# EAGLE board IEEE-ROV-Training (EAGLE 9.6.2)
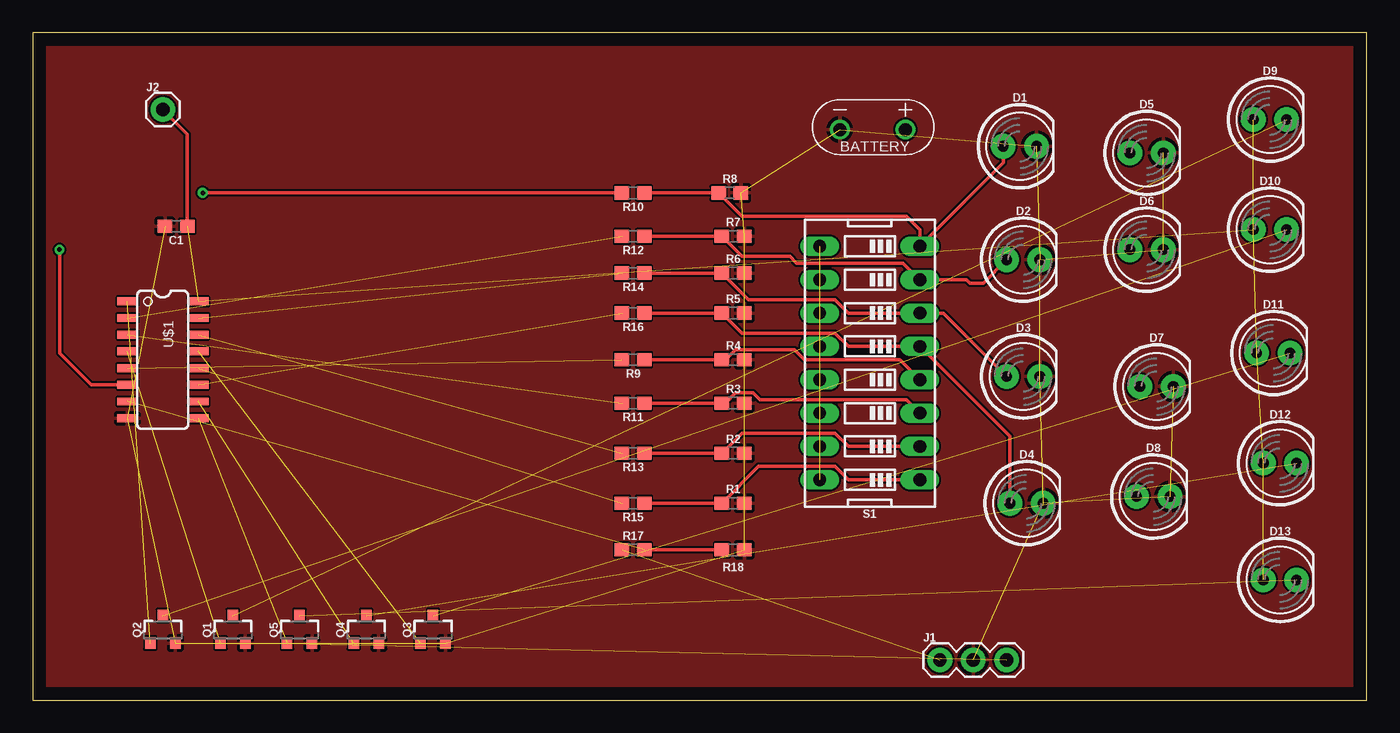
[diagram p0: board, top side]
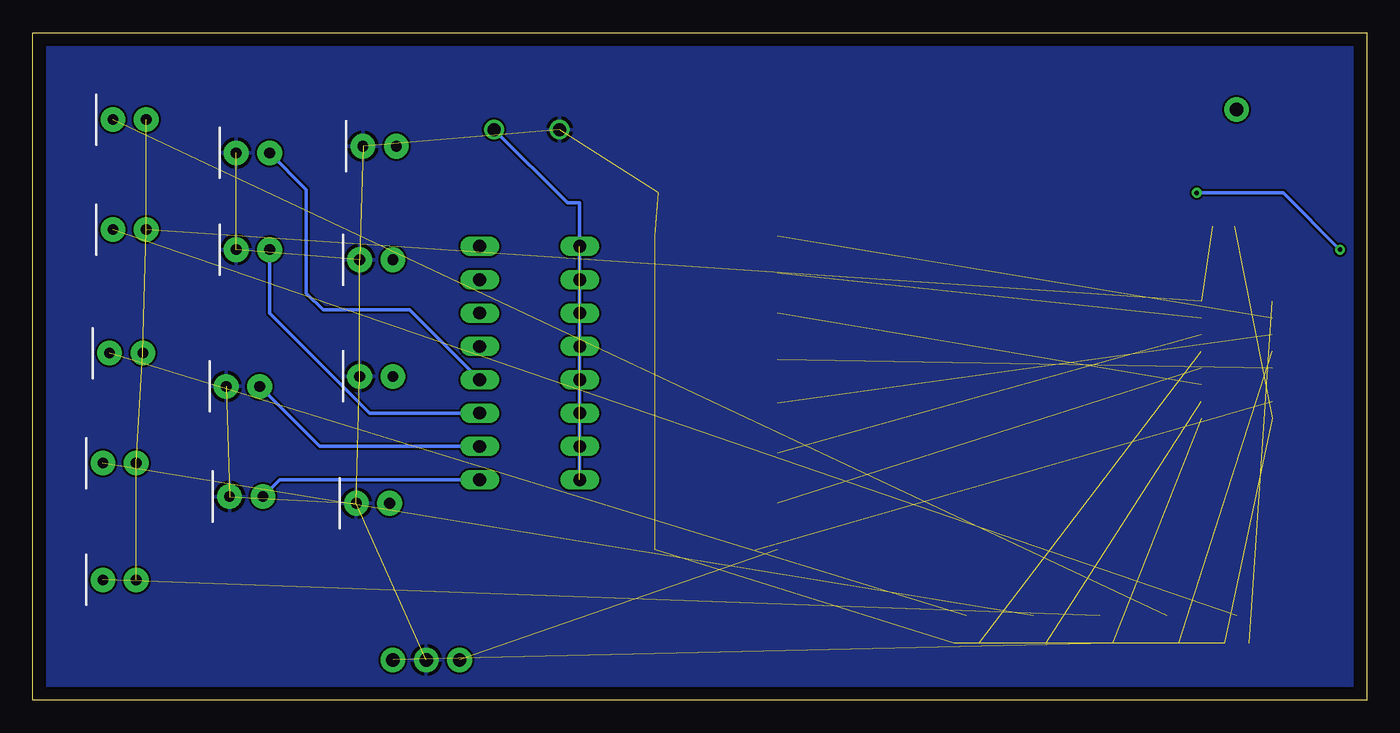
[diagram p1: board, bottom side, seen from below]

Size 101.6 x 50.8 mm. Coordinates in mm from the lower left corner, seen from the top.
Outline: 0,0 101.6,0 101.6,50.8 0,50.8 0,0
Copper layers (1*16): Top 0.035mm / dielectric 1.5mm / Bottom 0.035mm
Design rules "default": minimum track width 6mil, minimum drill 0.35mm, track to track 6mil, track to pad 6mil, pad to pad 6mil, via to via 6mil, smd to smd 6mil, copper to edge 40mil, drill to drill 6mil, minimum pad ring 10mil, minimum via ring 8mil, stop-mask expansion 4mil, vias tented up to drill 0mil, thermal gap 10mil

## Footprints (pad centres in the part's own frame; a part is rotated, then mirrored left to right if it is on the bottom)
0603 = smd 1.1 x 1: 1 -0.85,0; 2 0.85,0
LED_5MM = drill 0.813 pad 1.88: A -1.27,0; K 1.27,0
1X03 = drill 1.016 pad 1.88: 1 0,0; 2 2.54,0; 3 5.08,0
1X01 = drill 1.016 pad 1.88: 1 0,0
SOT23-3 = smd 0.8 x 0.9: 1 -0.95,-1; 2 0.95,-1; 3 0,1.1
DIPSWITCH-08 = drill 0.97 long: 1 -8.89,-3.81; 2 -6.35,-3.81; 3 -3.81,-3.81; 4 -1.27,-3.81; 5 1.27,-3.81; 6 3.81,-3.81; 7 6.35,-3.81; 8 8.89,-3.81; 9 8.89,3.81; 10 6.35,3.81; 11 3.81,3.81; 12 1.27,3.81; 13 -1.27,3.81; 14 -3.81,3.81; 15 -6.35,3.81; 16 -8.89,3.81
SO016 = smd 0.6 x 1.55: 1 -4.445,-2.7; 2 -3.175,-2.7; 3 -1.905,-2.7; 4 -0.635,-2.7; 5 0.635,-2.7; 6 1.905,-2.7; 7 3.175,-2.7; 8 4.445,-2.7; 9 4.445,2.7; 10 3.175,2.7; 11 1.905,2.7; 12 0.635,2.7; 13 -0.635,2.7; 14 -1.905,2.7; 15 -3.175,2.7; 16 -4.445,2.7
WIRE_LEADS = drill 1: P$1 0,0; P$2 5,0

## Placement (x,y rotation side)
C1  0.1uF  [0603]  10.92,36.07 180 top
D1  [LED_5MM]  75.18,42.16 0 top
D2  [LED_5MM]  75.44,33.53 0 top
D3  [LED_5MM]  75.44,24.64 0 top
D4  [LED_5MM]  75.69,14.99 0 top
D5  [LED_5MM]  84.84,41.66 0 top
D6  [LED_5MM]  84.84,34.29 0 top
D7  [LED_5MM]  85.6,23.88 0 top
D8  [LED_5MM]  85.34,15.49 0 top
D9  [LED_5MM]  94.23,44.2 0 top
D10  [LED_5MM]  94.23,35.81 0 top
D11  [LED_5MM]  94.49,26.42 0 top
D12  [LED_5MM]  95,18.03 0 top
D13  [LED_5MM]  95,9.14 0 top
J1  [1X03]  69.09,3.05 0 top
J2  [1X01]  9.91,44.96 0 top
Q1  [SOT23-3]  15.24,5.33 0 top
Q2  [SOT23-3]  9.91,5.33 0 top
Q3  [SOT23-3]  30.48,5.33 0 top
Q4  [SOT23-3]  25.4,5.33 0 top
Q5  [SOT23-3]  20.32,5.33 0 top
R1  10k  [0603]  53.34,14.99 0 top
R2  10k  [0603]  53.34,18.8 0 top
R3  10k  [0603]  53.34,22.61 0 top
R4  10k  [0603]  53.34,25.91 0 top
R5  10k  [0603]  53.34,29.46 0 top
R6  10k  [0603]  53.34,32.51 0 top
R7  10k  [0603]  53.34,35.31 0 top
R8  10k  [0603]  53.09,38.61 0 top
R9  51  [0603]  45.72,25.91 180 top
R10  51  [0603]  45.72,38.61 180 top
R11  51  [0603]  45.72,22.61 180 top
R12  51  [0603]  45.72,35.31 180 top
R13  51  [0603]  45.72,18.8 180 top
R14  51  [0603]  45.72,32.51 180 top
R15  51  [0603]  45.72,14.99 180 top
R16  51  [0603]  45.72,29.46 180 top
R17  51  [0603]  45.72,11.43 0 top
R18  10k  [0603]  53.34,11.43 180 top
S1  [DIPSWITCH-08]  63.75,25.65 90 top
U$1  CD74HC283  [SO016]  9.91,25.91 270 top
U$2  AAA_BATTERIES  [WIRE_LEADS]  61.47,43.43 0 top

## Library data of the parts
C1 = SparkFun-Capacitors; PROD_ID: CAP-08604
D1-D13 = SparkFun-LED
J1 J2 = SparkFun-Connectors
Q1-Q5 = SparkFun-DiscreteSemi; PROD_ID: TRANS-00830
R1-R18 = SparkFun-Resistors
S1 = SparkFun-Switches; PROD_ID: SWCH-12197; SF_SKU: COM-08034
U$1 U$2 = Soldering Workshop Library

## Nets
3.3V: C1.1 D9.A D10.A D11.A D12.A D13.A J2.1 U$1.16
A0: D5.A R4.1 R9.1 S1.4
A1: D6.A R3.1 R11.1 S1.3
A2: D7.A R2.1 R13.1 S1.2
A3: D8.A R1.1 R15.1 S1.1
B0: D1.A R8.1 R10.1 S1.8
B1: D2.A R7.1 R12.1 S1.7
B2: D3.A R6.1 R14.1 S1.6
B3: D4.A R5.1 R16.1 S1.5
CIN: J1.1 R17.1
COUT: J1.3 Q5.1 U$1.9
GND: C1.2 D1.K D2.K D3.K D4.K D5.K D6.K D7.K D8.K J1.2 Q1.2 Q2.2 Q3.2 Q4.2 Q5.2 R1.2 R2.2 R3.2 R4.2 R5.2 R6.2 R7.2 R8.2 R18.1 U$1.8 U$2.P$1
N$1: R10.2 U$1.6
N$2: R12.2 U$1.2
N$3: R13.2 U$1.14
N$4: R15.2 U$1.12
N$5: R17.2 R18.2 U$1.7
N$6: R14.2 U$1.15
N$7: R9.2 U$1.5
N$8: R16.2 U$1.11
N$9: R11.2 U$1.3
N$10: D9.K Q1.3
N$11: D10.K Q2.3
N$12: D11.K Q3.3
N$13: D12.K Q4.3
N$14: D13.K Q5.3
N$15: Q1.1 U$1.4
N$16: Q2.1 U$1.1
N$17: Q3.1 U$1.13
N$18: Q4.1 U$1.10
VCC: S1.9 S1.10 S1.11 S1.12 S1.13 S1.14 S1.15 S1.16 U$2.P$2

## Tracks (layer width: path | path; a pad name or v marks a point on that pad's centre or on a via)
3.3V  (6 unrouted)
  Top 0.254: C1.1 11.77,43.09 J2.1
A0
  Top 0.254: R9.1 R4.1 52.74,25.91 53.52,26.69 58,26.69 58.78,25.91 66.04,25.91 S1.4
  Bottom 0.254: S1.4 72.9,29.72 79.5,29.72 80.77,30.99 80.77,38.86 D5.A
A1
  Top 0.254: R11.1 R3.1 52.74,22.61 53.52,23.39 54.86,23.39 55.38,22.86 66.55,22.86 S1.3
  Bottom 0.254: S1.3 75.95,21.84 83.57,29.46 D6.A
A2
  Top 0.254: R13.1 R2.1 54.02,20.32 61.1,20.32 62.12,19.3 S1.2
  Bottom 0.254: S1.2 79.76,19.3 D7.A
A3
  Top 0.254: R15.1 R1.1 55.29,17.78 61.1,17.78 62.12,16.76 S1.1
  Bottom 0.254: S1.1 82.8,16.76 D8.A
B0
  Top 0.254: R10.1 R8.1 54.01,36.83 66.55,36.83 67.56,35.81 S1.8 73.91,40.89 D1.A
B1
  Top 0.254: R12.1 R7.1 54.01,33.78 57.66,33.78 58.17,33.27 66.29,33.27 S1.7 71.12,32 71.37,31.75 72.39,31.75 D2.A
B2
  Top 0.254: R14.1 R6.1 54.52,30.48 61.1,30.48 62.12,29.46 S1.6 69.34,29.46 D3.A
B3
  Top 0.254: R16.1 R5.1 54.01,27.94 61.1,27.94 62.12,26.92 S1.5 74.42,20.07 D4.A
CIN  (1 unrouted)
COUT  (2 unrouted)
GND  (25 unrouted)
  pour Top: -2.54,53.34 -2.54,-2.54 104.14,-2.54 104.14,53.34
  pour Bottom: -2.54,53.34 -2.54,-2.54 104.14,-2.54 104.14,53.34
N$1  (via drill 0.35)
  Top 0.254: R10.2 v12.95,38.61 | v2.03,34.29 2.03,26.42 4.45,24 U$1.6
  Bottom 0.254: v12.95,38.61 6.35,38.61 v2.03,34.29
N$2  (1 unrouted)
N$3  (1 unrouted)
N$4  (1 unrouted)
N$5  (1 unrouted)
  Top 0.254: R17.2 R18.2
N$6  (1 unrouted)
N$7  (1 unrouted)
N$8  (1 unrouted)
N$9  (1 unrouted)
N$10  (1 unrouted)
N$11  (1 unrouted)
N$12  (1 unrouted)
N$13  (1 unrouted)
N$14  (1 unrouted)
N$15  (1 unrouted)
N$16  (1 unrouted)
N$17  (1 unrouted)
N$18  (1 unrouted)
VCC  (7 unrouted)
  Bottom 0.254: U$2.P$2 60.88,37.85 59.94,37.85 S1.16